# Altium PCB Driver001.PcbDoc
Units mm, origin at the board's own origin, x right, y up, seen from the top; angles counter-clockwise.
Board outline 81 x 61.75 mm, 2 copper layers (Top Layer, Bottom Layer); 27 components, 15 nets, 81 pads, 0 vias.
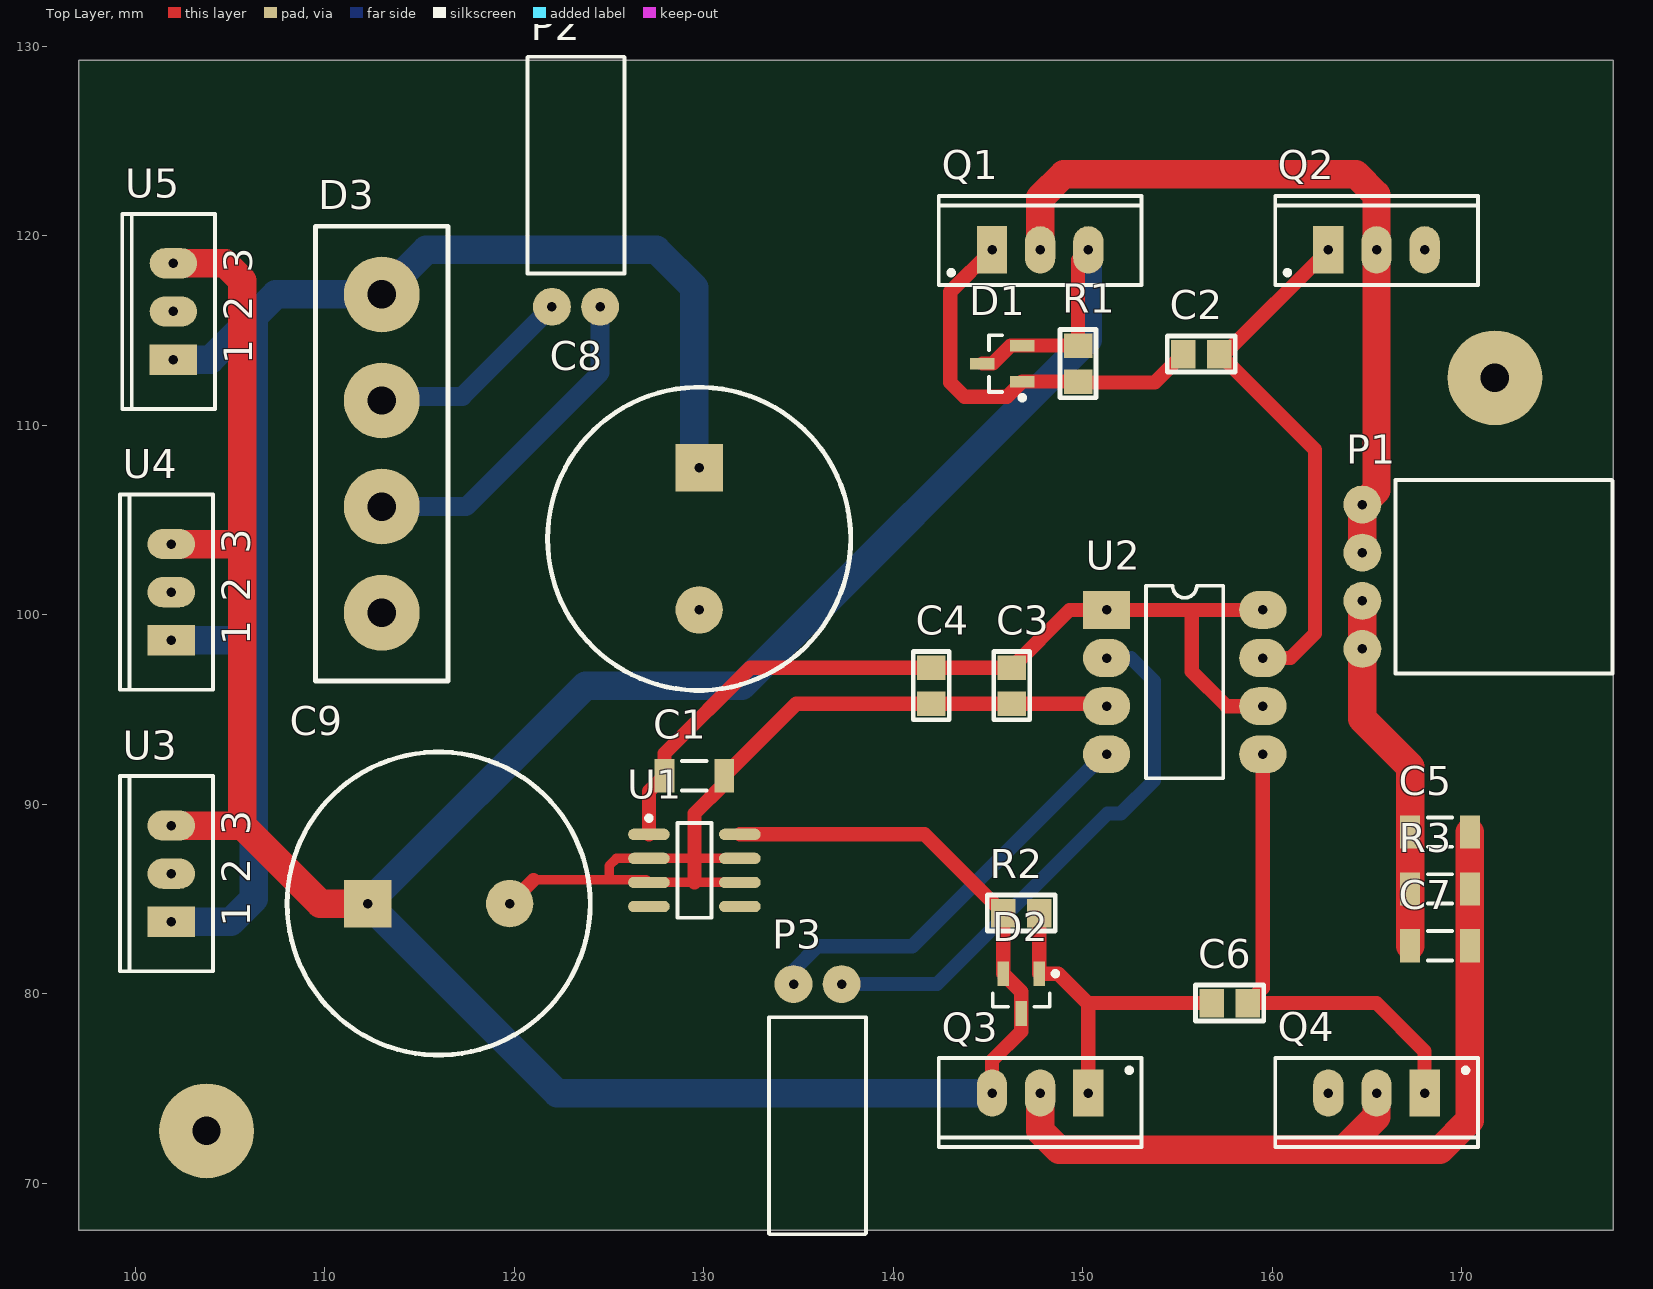
[diagram p0: Top Layer view]
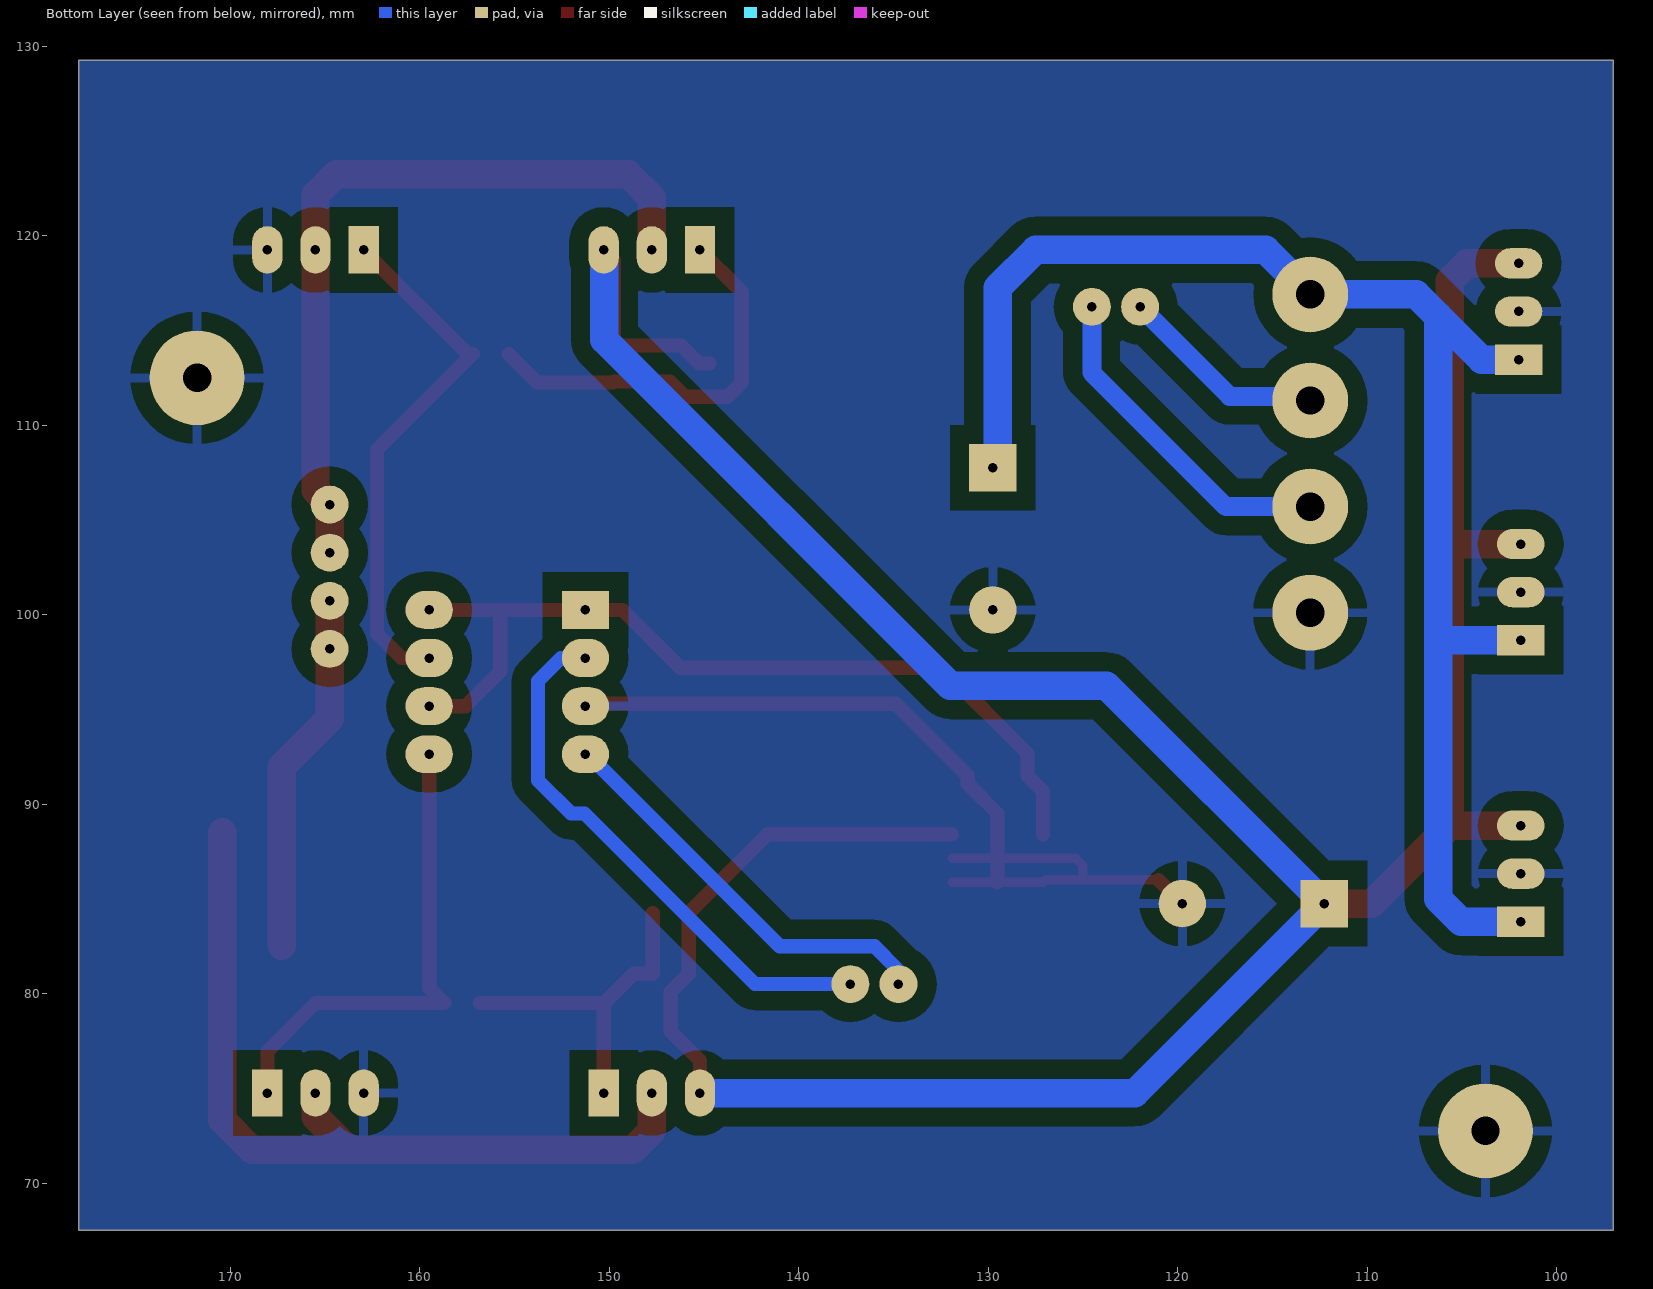
[diagram p1: Bottom Layer view, seen from below]

## Layer stack, top to bottom
Top Layer: signal copper 0.0356
Dielectric: dielectric 0.32, FR-4, Dk 4.8
Bottom Layer: signal copper 0.0356

## Board outline
97,129.25 178,129.25 178,67.5 97,67.5

## Design rules (kind name [scope] priority, off if disabled: settings)
Clearance "Clearance_GND_VCC +3.3" [InNet('GND') vs InNet('VCC +3.3')] p1 off: gap=0.2
Clearance Clearance_U3_Trace [(IsTrack  And IsNet)  And InRegion(3815,3770 ,4275 ,4280) vs (IsTrack  And IsNet)  And InRegion(3815,3770 ,4275 ,4280)] p2: gap=0.2
Clearance Clearance_QFP_NET [InNet('SPI_MISO/DO','SPI_MOSI/DI','GND','VCC','GDO2','GDO0','SPI_SS','SPI_SCK','NetC3_1','NetC2_1','GND','NetC1_2','NetANT1_1','NetR1_2')  And InRegion(3815,3770 ,4275 ,4280) vs InNet('SPI_MISO','SPI_MOSI','GND','VCC','GDO2','GDO0','SPI_SS','SPI_SCK','NetC3_1','NetC2_1','GND')  And InRegion(3815,3770 ,4275 ,4280)] p3: gap=0.2
Clearance Clearance_QFP_Pins [InComponent('U1') And IsPad] p4: gap=0.2
Clearance Clearance_GND [InPolygon] p5: gap=1
Clearance [All] p6: gap=0.3
ComponentClearance ComponentClearance_R1_C10 [InComponent('C10') vs InComponent('R1')] p1 off: gap=0 collisioncheckmode=3 verticalgap=0 showdistances=FALSE
ComponentClearance [All] p2 off: gap=0.3 collisioncheckmode=3 verticalgap=0.3 showdistances=FALSE
Height [All] p1: minheight=0 maxheight=127 prefheight=12.7
HoleSize [All] p1: absolutevalues=TRUE maxlimit=5 minlimit=0.3 maxpercent=80.000 minpercent=20.000
NetAntennae [All] p1: netantennaetolerance=50
PlaneConnect [All] p1: planeconnectstyle=Relief reliefexpansion=0.508 reliefentries=4 reliefconductorwidth=0.3 reliefairgap=0.3
PolygonConnect [All] p1: connectstyle=Relief reliefconductorwidth=0.5 reliefentries=4 polygonreliefangle="90 Angle"
RoutingCorners [All] p1: cornerstyle=45-Degree minsetback=2.54 maxsetback=5
RoutingVias [All] p1: holewidth=0.5 width=1.6 viastyle="Through Hole" minholewidth=0.3 minwidth=1 maxholewidth=1 maxwidth=2
ShortCircuit ShortCircuit_ANT1 [InComponent('ANT1')] p1: allowed=TRUE
ShortCircuit [All] p2: allowed=FALSE
SilkToSilkClearance [All] p1: silktosilkclearance=0.3
SilkscreenOverComponentPads [All] p1: minsilkscreentomaskgap=0.254
SolderMaskExpansion [All] p1: expansion=0.102
Width [All] p1: maxlimit=5 minlimit=0.2 preferedwidth=0.3
19 further rules are at their usual default settings.

## Components (designator, comment, footprint, x,y, rotation, side; value= is the part's Value field where it differs from the comment)
C1 "SMD_1206" SMD-1206 129.5,91.5 r0 top
C2 "KONDENS_SMD" C0805 156.25,113.75 r0 top
C3 "KONDENS_SMD" C0805 146.25,96.25 r90 top
C4 "KONDENS_SMD" C0805 142,96.25 r90 top
C5 "SMD_1206" SMD-1206 168.85,88.525 r180 top
C6 "KONDENS_SMD" C0805 157.75,79.5 r0 top
C7 "SMD_1206" SMD-1206 168.85,82.525 r180 top
C8 "K50-35" CAP_POL_D16 129.75,104 r270 top
C9 "K50-35" CAP_POL_D16 116,84.75 r0 top
D1 "BAT54S" SOT23_N 145.75,113.25 r180 top
D2 "BAT54S" SOT23_N 146.75,80 r270 top
D3 "RS607" RS607 113,108.5 r90 top
P1 "WF-04MR" WF-04MR 164.75,102 r270 top
P2 "WF-02MR" WF-02MR 123.25,116.25 r0 top
P3 "WF-02MR" WF-02MR 136,80.5 r180 top
Q1 "IRF4905" TO-220AB 147.75,119.25 r0 top
Q2 "IRF1010E" TO-220AB 165.5,119.25 r0 top
Q3 "IRF4905" TO-220AB 147.75,74.75 r180 top
Q4 "IRF1010E" TO-220AB 165.5,74.75 r180 top
R1 "RES" C0805 149.75,113.25 r90 top
R2 "RES" C0805 146.75,84.25 r180 top
R3 "1206" SMD-1206 168.85,85.525 r0 top
U1 "MC78L09ACD" 751-05_N 129.5,86.5 r0 top
U2 "UCC27423" PDIP 151.25,100.25 r0 top
U3 "MC7824ACT" 221A-06 101.886,86.326 r90 top
U4 "MC7824ACT" 221A-06 101.886,101.185 r90 top
U5 "MC7824ACT" 221A-06 102,116 r90 top

## Footprints (in the part's own frame and the unit in brackets; to place one, negate y for a bottom-side part, rotate by r counter-clockwise, add the part's x,y. Pads: shape width x height; smd on the part's side, far side on the other; paste and mask are expansions set on the pad)
221A-06 [mm] "TO, Thru-Hole, Vertical, Heatsink Mounted; 3 In-Line Leads; Pitch 2.54 mm"
  rect 1.6x2.5 hole 0.5: 1(-2.54,0)
  oval 1.6x2.5 hole 0.5: 2(0,0) 3(2.54,0)
  silkscreen extent -5.15,-2.2 5.15,2.7
751-05_N [mm] "SOIC, 8-Leads, Body 4.9x3.9mm, Pitch 1.27mm, IPC Medium Density"
  oval 2.2x0.6 smd: 1(-2.4,1.905) 2(-2.4,0.635) 3(-2.4,-0.635) 4(-2.4,-1.905) 5(2.4,-1.905) 6(2.4,-0.635) 7(2.4,0.635) 8(2.4,1.905)
  silkscreen extent -2.52,-2.5 0.9,2.88, body extent -1.95,-2.45 1.95,2.45, height 1.75
C0805 [mm]
  rect 1.3x1.5 smd: 1(-0.95,0) 2(0.95,0)
  silkscreen extent -1.8,-0.95 1.8,0.95
CAP_POL_D16 [mm]
  rect 2.5x2.5 hole 0.5 unplated: 1(-3.75,0)
  round 2.5 hole 0.5 unplated: 2(3.75,0)
  silkscreen extent -8,-8 8,8, body extent -7.94,-7.98 8,7.98, height 31.5
PDIP [mm]
  rect 2.5x2 hole 0.5: 1(0,0)
  oval 2.5x2 hole 0.5: 2(0,-2.54) 3(0,-5.08) 4(0,-7.62) 5(8.25,-7.62) 6(8.25,-5.08) 7(8.25,-2.54) 8(8.25,0)
  silkscreen extent 2.08,-8.89 6.16,1.27
RS607 [mm]
  round 4 hole 1.5: 1(-8.4,0) 2(-2.8,0) 3(2.8,0) 4(8.4,0)
  silkscreen extent -12,-3.5 12,3.5
SMD-1206 [mm] "Chip Resistor, 2-Leads, Body 3,3x1,6mm, IPC Medium Density"
  rect 1.05x1.75 smd: 1(-1.575,0) 2(1.575,0)
  silkscreen extent -0.65,-0.77 0.65,0.77, body extent -1.65,-0.81 1.65,0.81, height 0.5
SOT23_N [mm] "SOT23, 3-Leads, Body 2.9x1.3mm, Pitch 0.95mm, Lead Span 2.3mm, IPC Medium Density"
  rect 1.3x0.6 smd: 1(-1.05,0.95) 2(-1.05,-0.95) 3(1.05,0)
  silkscreen extent -1.18,-1.5 0.7,1.92, body extent -0.7,-1.5 0.7,1.5, height 1.1
TO-220AB [mm] "TO, Thru-Hole, Vertical, Heatsink Mounted; 3 In-Line Leads; Pitch 2.54 mm"
  rect 1.6x2.5 hole 0.5: 1(-2.54,0)
  oval 1.6x2.5 hole 0.5: 2(0,0) 3(2.54,0)
  silkscreen extent -5.35,-1.85 5.35,2.85, body extent -5.4,-1.9 5.4,2.9, height 19.3
WF-02MR [mm]
  round 2 hole 0.5: 1(-1.27,0) 2(1.27,0)
  silkscreen extent -2.56,1.75 2.56,13.2
WF-04MR [mm]
  round 2 hole 0.5: 1(-3.81,0) 2(-1.27,0) 3(1.27,0) 4(3.81,0)
  silkscreen extent -5.1,1.75 5.1,13.2

## Part data
C1 C5 C7: library part "Capasitor SMD_1206"
C8 C9: library part "Capasitor_pol D16"
D1 D2: "Schottky Barrier Double Diode"
Q1 Q2 Q3 Q4: "HEXFET Power MOSFET"
R1 R2: "Resistor"
R3: library part "Resistor SMD_1206"
U1: "Three-Terminal Low Current Positive Voltage Regulator"
U3 U4 U5: "Three-Terminal Positive Voltage Regulator"

## Free pads (board coordinates)
  round 5 hole 1.5: 0(171.75,112.5) 1(103.75,72.75)

## Nets (pads, with @x,y where several pads share a name; then routed paths per layer and width w, separated by ;. In a path a pad name is that pad's centre, name@x,y a point inside that pad or via, vN(x,y) a via of type N, cw(c..) or ccw(c..) an arc to the next point about the centre after c; other vN are vias at no path point)
GND: C1.2 C3.1 C4.1 C8.2 C9.2 D3.1 pad.0 pad.1 Q2.3 Q4.3 U1.2 U1.3 U1.6 U1.7 U2.3 U3.2 U4.2 U5.2 | length 48.6
  Top Layer w0.5: 121,86 125,86 ; U1.6 129.5,85.865 U1.3 126.965,86 125,86 ; U1.7 129.5,87.135 U1.2 125.385,87.135 125,86.75 125,86
  Top Layer w0.75: C9.2 121,86 ; 129.5,85.865 129.5,87.135 129.5,89.5 131.075,91.075 C1.2 134.875,95.3 C4.1 C3.1 151.12,95.3 U2.3
NetC2_1: C2.1 D1.1 Q1.1 R1.1 | length 21.5
  Top Layer w0.75: Q1.1 143,117.04 143,112.25 143.75,111.5 146,111.5 D1.1 R1.1 149.8,112.25 153.8,112.25 C2.1
NetC2_2: C2.2 Q2.1 U2.7 | length 28.2
  Top Layer w0.75: U2.7 160.96,97.71 162.25,99 162.25,108.7 C2.2 157.46,113.75 Q2.1
NetC5_1: C5.1 C7.1 Q3.2 Q4.2 R3.2 | length 44.7
  Top Layer w1.5: Q3.2 147.75,72.75 148.75,71.75 163.75,71.75 ; Q4.2 165.5,73.5 163.75,71.75 ; C5.1 R3.2 C7.1 170.425,73.325 168.85,71.75 163.75,71.75
NetC5_2: C5.2 C7.2 P1.3 P1.4 R3.1 | length 19.3
  Top Layer w1.5: P1.3 P1.4 164.75,94.5 167.275,91.975 C5.2 R3.1 C7.2
NetC6_1: C6.1 D2.1 Q3.1 R2.1 | length 17.7
  Top Layer w0.75: R2.1 D2.1 148.7,81.05 150.29,79.46 ; Q3.1 150.29,79.46 ; C6.1 150.33,79.5 150.29,79.46
NetC6_2: C6.2 Q4.1 U2.5 | length 26.1
  Top Layer w0.75: U2.5 159.5,80.3 C6.2 165.5,79.5 168.04,76.96 Q4.1
NetC8_1: C8.1 D3.4 U3.1 U4.1 U5.1 | length 80.4
  Bottom Layer w1.5: U3.1 105.036,83.786 106.25,85 106.25,98.75 ; U4.1 106.145,98.645 106.25,98.75 ; U5.1 103.96,113.46 106.25,115.75 ; C8.1 129.5,108 129.5,117.25 127.5,119.25 115.35,119.25 D3.4 107.4,116.9 106.25,115.75 ; 106.25,98.75 106.25,115.75
NetD3_2: D3.2 P2.2 | length 17.9
  Bottom Layer w1: D3.2 117.45,105.7 124.52,112.77 P2.2
NetD3_3: D3.3 P2.1 | length 11
  Bottom Layer w1: D3.3 113.22,111.52 117.25,111.52 P2.1
NetP1_1: P1.1 P1.2 Q1.2 Q2.2 | length 40.7
  Top Layer w1.5: Q1.2 147.75,122 149,123.25 164.4,123.25 165.5,122.15 Q2.2 165.5,106.56 P1.1 P1.2
NetP3_1: P3.1 U2.2 | length 29.2
  Bottom Layer w0.75: P3.1 142.3,80.5 151.3,89.5 152,89.5 153.75,91.25 153.75,96.5 152.54,97.71 U2.2
NetP3_2: P3.2 U2.4 | length 22
  Bottom Layer w0.75: P3.2 134.75,80.52 134.75,81.25 136,82.5 141,82.5 151.13,92.63 U2.4
VCC_9V: C1.1 C3.2 C4.2 U1.1 U2.1 U2.6 U2.8 | length 47.1
  Top Layer w0.75: U1.1 127.1,90.675 C1.1 127.925,92.675 132.45,97.2 C4.2 C3.2 149.3,100.25 U2.1 155.75,100.25 ; U2.6 157.58,95.17 155.75,97 155.75,100.25 ; U2.8 155.75,100.25
VGDT: C9.1 D1.2 D1.3 D2.2 D2.3 Q1.3 Q3.3 R1.2 R2.2 U1.8 U3.3 U4.3 U5.3 | length 177.7
  Top Layer w0.75: U1.8 141.645,88.405 R2.2 D2.2 145.8,81.045 146.75,80.095 D2.3 146.75,78 145.21,76.46 Q3.3 ; D1.3 145.25,113.25 146.2,114.2 D1.2 R1.2 149.75,118.71 Q1.3
  Top Layer w1.5: U3.3 105.634,88.866 ; U4.3 105.609,103.725 105.634,103.75 ; U5.3 104.728,118.54 105.634,117.634 105.634,103.75 ; C9.1 109.75,84.75 105.634,88.866 ; 105.634,88.866 105.634,103.75
  Bottom Layer w1.5: Q3.3 122.25,74.75 C9.1 123.75,96.25 132,96.25 150.25,114.5 150.25,119.21 Q1.3
pads on no net: U1.4 U1.5

## Polygon pours and split planes (outlines as drawn)
GND on Bottom Layer "Bottom Layer-No Net" (solid, pour order 2): 97,129.25 178,129.25 178,67.5 97,67.5

## Text inside footprints (layer, text, board x,y; h text height)
U3: Top Overlay "3" at 106.061,88.366 h1.5 r90; Top Overlay "2" at 106.061,85.826 h1.5 r90; Top Overlay "1" at 106.061,83.536 h1.5 r90
U4: Top Overlay "3" at 106.061,103.225 h1.5 r90; Top Overlay "2" at 106.061,100.685 h1.5 r90; Top Overlay "1" at 106.061,98.395 h1.5 r90
U5: Top Overlay "3" at 106.175,118.04 h1.5 r90; Top Overlay "2" at 106.175,115.5 h1.5 r90; Top Overlay "1" at 106.175,113.21 h1.5 r90